# Altium PCB Energieversorgung.PcbDoc
Units mm, origin at the board's own origin, x right, y up, seen from the top; angles counter-clockwise.
Board outline 150 x 150 mm, 2 copper layers (Top Layer, Bottom Layer); 20 components, 16 nets, 81 pads, 5 vias.
Unrouted connection lines stored in the file: 7.
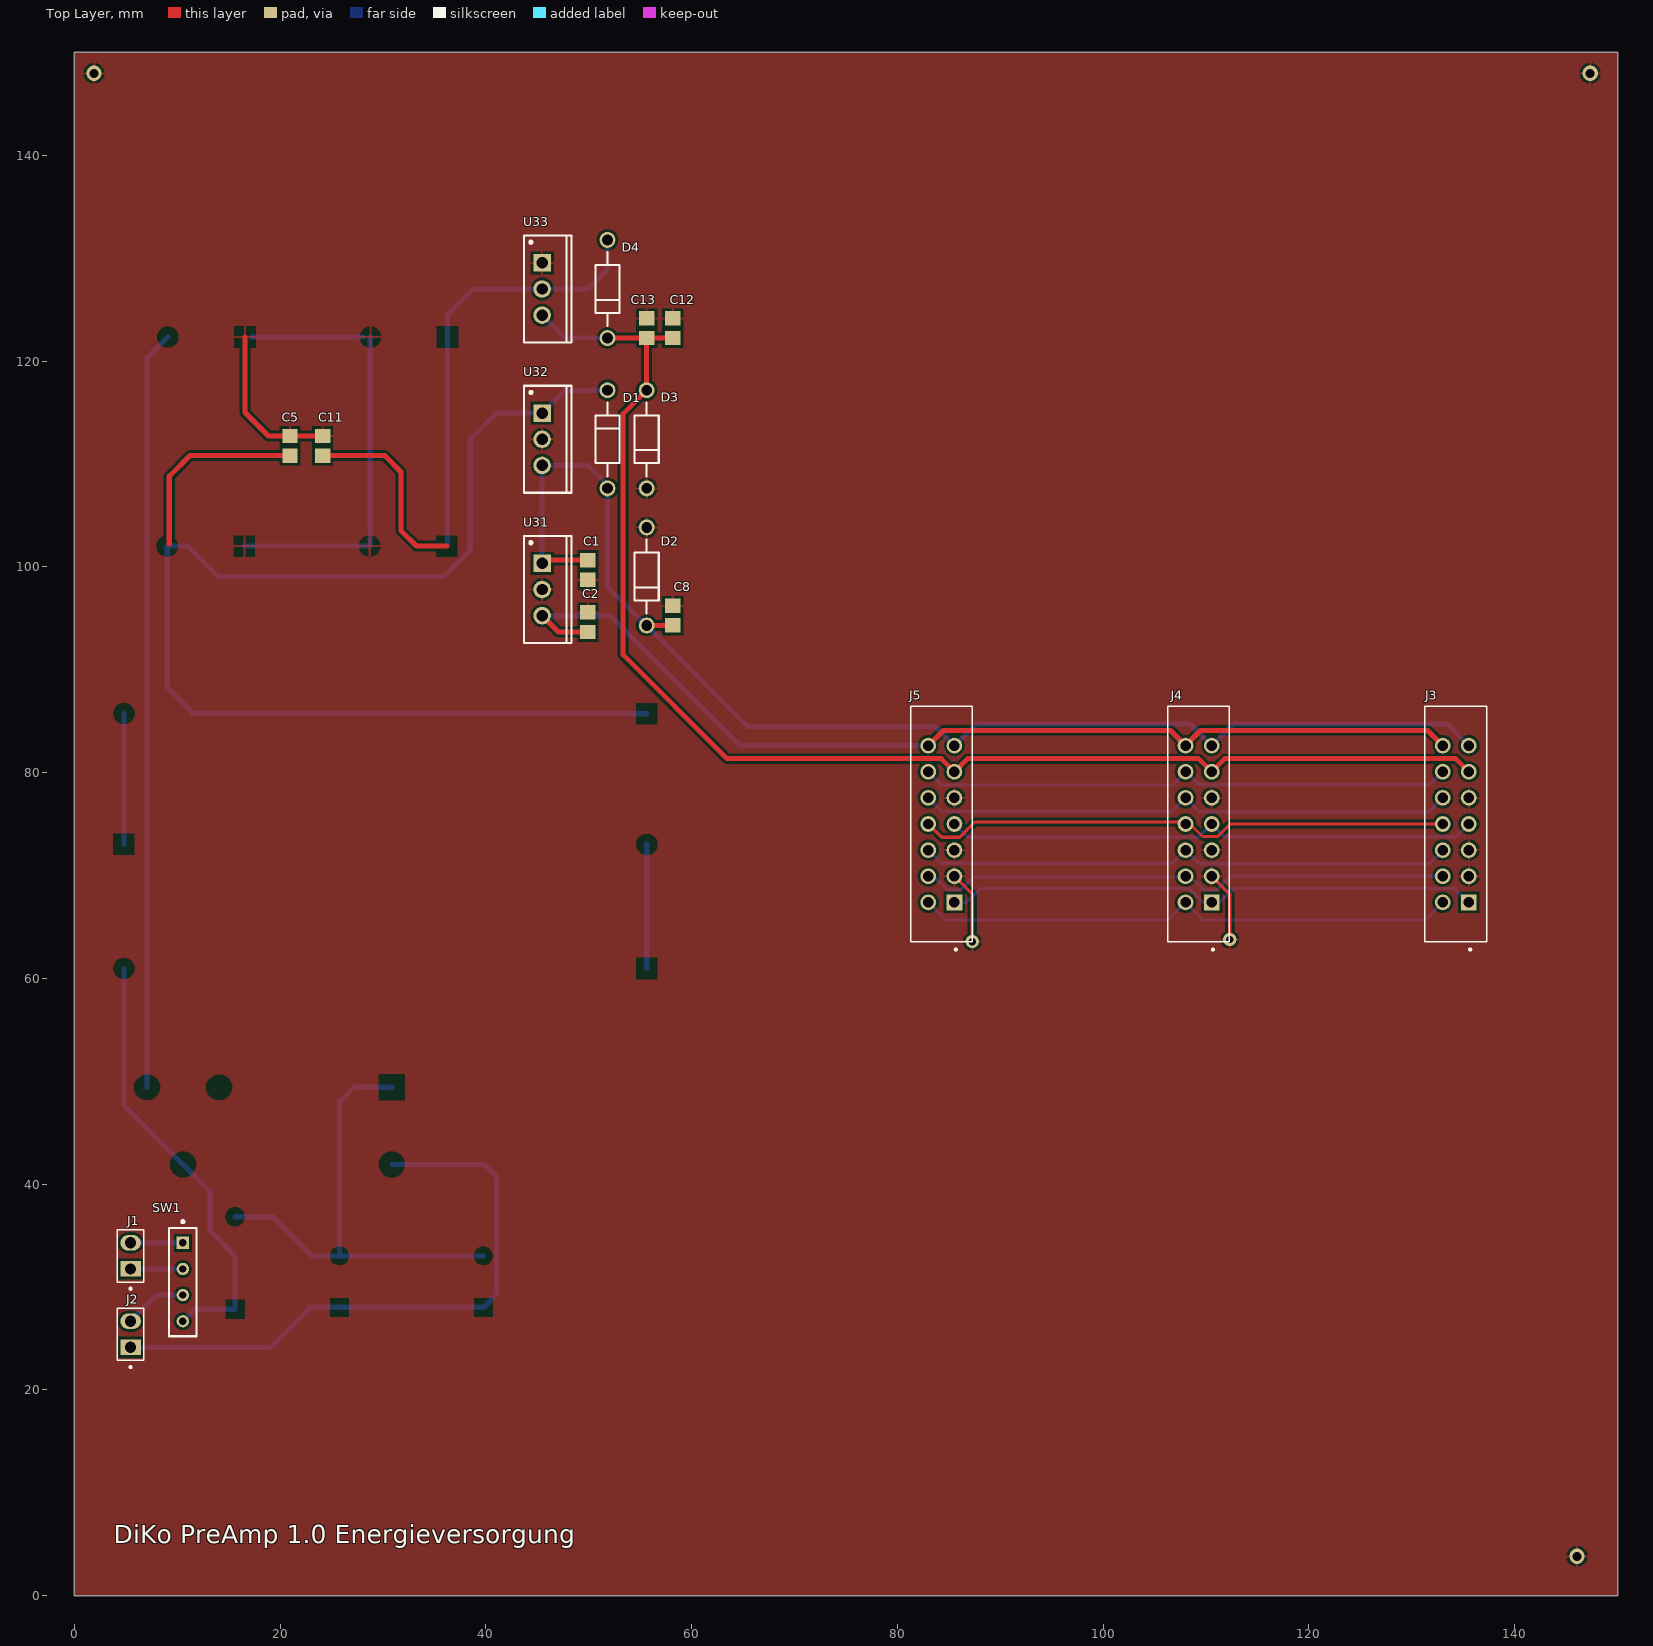
[diagram p0: Top Layer view]
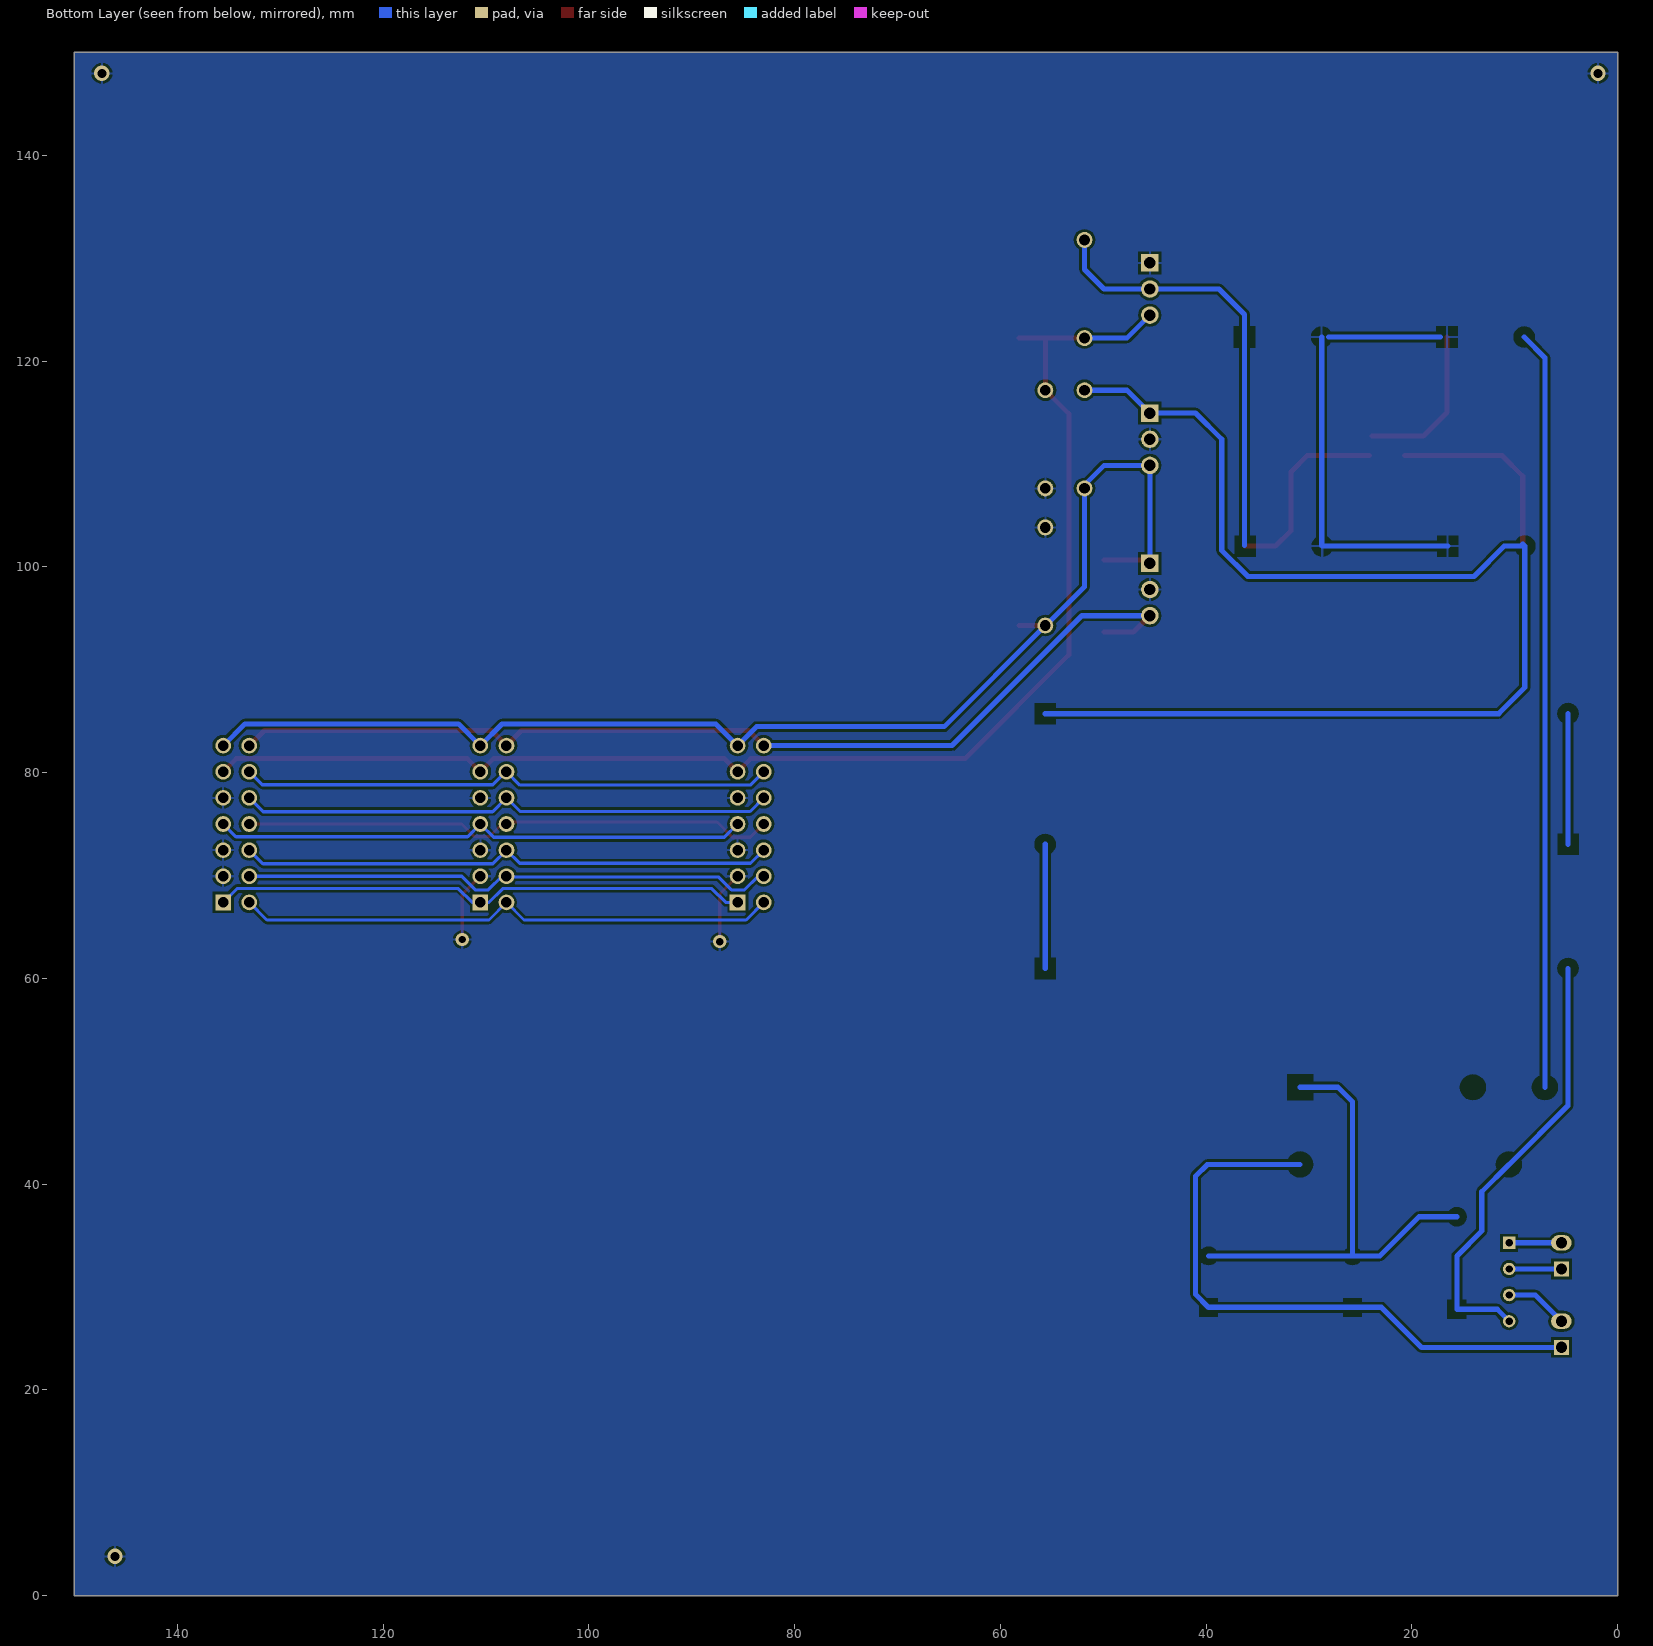
[diagram p1: Bottom Layer view, seen from below]

## Layer stack, top to bottom
Top Solder: solder mask 0.0102, Solder Resist, Dk 3.5
Top Layer: signal copper 0.0356
Dielectric 1: dielectric 0.32, FR-4, Dk 4.8
Bottom Layer: signal copper 0.0356
Bottom Solder: solder mask 0.0102, Solder Resist, Dk 3.5

## Board outline
0,0 150,0 150,150 0,150

## Design rules (kind name [scope] priority, off if disabled: settings)
Clearance [All] p1: gap=0.254 ignorepadtopadclearanceinfootprint=FALSE except(0: Arc-Hole Track-Hole SMDPad-Hole THPad-Hole Via-Hole Fill-Hole Poly-Hole Region-Hole Text-Hole)
HoleSize [All] p1: absolutevalues=TRUE maxlimit=5.08 minlimit=0.152 maxpercent=80.000 minpercent=20.000
HoleToHoleClearance [All] p1: gap=0.203 allowstackedmicrovias=TRUE
MinimumSolderMaskSliver [All] p1: minsoldermaskwidth=0.102
PolygonConnect [All] p1: connectstyle=Relief reliefconductorwidth=0.254 reliefentries=4 polygonreliefangle="90 Angle" airgapwidth=0.254
RoomDefinition Energieversorgung [InComponentClass('Energieversorgung')] p1: confinementstyle=ConfineIn formatcopy=TRUE lockcomponents=FALSE outline -25.4,-25.4 25.4,-25.4 25.4,0 -25.4,0
RoutingVias [All] p1: holewidth=0.9 width=1.5 viastyle="Through Hole" minholewidth=0.711 minwidth=1.27 maxholewidth=0.914 maxwidth=1.524
SilkToSilkClearance [All] p1: silktosilkclearance=0.102
SilkToSolderMaskClearance [IsPad] p1: minsilkscreentomaskgap=0.152 clearancetoexposedcopper=TRUE
SolderMaskExpansion [All] p1: expansion=0.051 istentingtop=FALSE
Width +18V [InNet('+18V')] p1: maxlimit=0.483 minlimit=0.381 preferedwidth=0.483 minimp=50.000000 maximp=50.000000 favimp=50.000000
Width -18V [InNet('-18V')] p2: maxlimit=0.483 minlimit=0.381 preferedwidth=0.483 minimp=50.000000 maximp=50.000000 favimp=50.000000
Width +6V [InNet('+6V')] p3: maxlimit=0.508 minlimit=0.508 preferedwidth=0.508
Width +5V_DP [InNet('5V_DP')] p4: maxlimit=0.508 minlimit=0.381 preferedwidth=0.381
Width [All] p5: maxlimit=0.508 minlimit=0.254 preferedwidth=0.305
25 further rules are at their usual default settings.

## Components (designator, comment, footprint, x,y, rotation, side; value= is the part's Value field where it differs from the comment)
C1 "330n" 0805 49.911,99.695 r90 top
C2 "100n" 0805 49.911,94.615 r270 top
C5 "330n" 0805 20.955,111.76 r270 top
C8 "100n" 0805 58.166,95.25 r270 top
C11 "2u" 0805 24.13,111.76 r270 top
C12 "1u" 0805 58.166,123.19 r270 top
C13 "100n" 0805 55.626,123.19 r90 top
D1 "1N4001 Diode" "1N4001 Diode" 51.816,112.395 r270 top
D2 "1N4001 Diode" "1N4001 Diode" 55.626,99.06 r90 top
D3 "1N4001 Diode" "1N4001 Diode" 55.626,112.395 r90 top
D4 "1N4001 Diode" "1N4001 Diode" 51.816,127 r90 top
J1 "Connector x2" "Connector x2" 5.461,33.02 r90 top
J2 "Connector x2" "Connector x2" 5.461,25.4 r90 top
J3 "Connector x14" "Connector x14" 133,75 r270 top
J4 "Connector x14" "Connector x14" 108,75 r270 top
J5 "Connector x14" "Connector x14" 83,75 r270 top
SW1 "G23AP" "Connector x4" 10.541,30.48 r270 top
U31 "7806" "TO220 Spannungsregler 78xx" 45.466,97.79 r270 top
U32 "7818" "TO220 Spannungsregler 78xx" 45.466,112.395 r270 top
U33 "7918" "TO220 Spannungsregler 79xx" 45.466,127 r270 top

## Footprints (in the part's own frame and the unit in brackets; to place one, negate y for a bottom-side part, rotate by r counter-clockwise, add the part's x,y. Pads: shape width x height; smd on the part's side, far side on the other; paste and mask are expansions set on the pad)
"1N4001 Diode" [mm] "AXIAL, 2-Leads, Diameter 2.35mm"
  round 1.55 hole 1.05: 1(-4.77,0) 2(4.77,0)
  silkscreen extent -3.59,-1.17 3.59,1.17
0805 [mm] "0805"
  rect 1.4x1.5 smd: 1(-0.95,0) 2(0.95,0)
  body extent -1.05,-0.67 1.05,0.67, height 1.35
"Connector x2" [mm]
  rect 1.508x2 / inner round 1.45 / far side rect 1.45x1.45 hole 1.1: 01(-1.27,0)
  oval 1.508x2 hole 1.1: 02(1.27,0)
  silkscreen extent -3.29,-1.27 2.54,1.27
"Connector x4" [mm]
  rect 1.2x1.2 hole 0.7 paste-1000 mask+0: 1(-3.81,0)
  round 1.2 hole 0.7 paste-1000 mask+0: 2(-1.27,0) 3(1.27,0) 4(3.81,0)
  silkscreen extent -5.99,-1.34 5.27,1.34, body extent -5.37,-1.44 5.37,1.44, height 0.25
"Connector x14" [mm]
  rect 1.53x1.53 hole 1.02: 1(7.62,2.54)
  round 1.53 hole 1.02: 2(7.62,0) 3(5.08,2.54) 4(5.08,0) 5(2.54,2.54) 6(2.54,0) 7(0,2.54) 8(0,0) 9(-2.54,2.54) 10(-2.54,0) 11(-5.08,2.54) 12(-5.08,0) 13(-7.62,2.54) 14(-7.62,0)
  silkscreen extent -11.43,-1.73 12.3,4.27
"TO220 Spannungsregler 78xx" [mm] "TO, Thru-Hole, Vertical, Heatsink Mounted; 3 In-Line Leads; Pitch 2.54 mm"
  rect 1.7x1.7 hole 1.1: 1(-2.54,0)
  round 1.7 hole 1.1: 2(0,0) 3(2.54,0)
  silkscreen extent -5.2,-1.75 5.2,2.85, body extent -5.25,-1.8 5.25,2.9, height 19.7
"TO220 Spannungsregler 79xx" [mm] "TO, Thru-Hole, Vertical, Heatsink Mounted; 3 In-Line Leads; Pitch 2.54 mm"
  rect 1.7x1.7 hole 1.1: 1(-2.54,0)
  round 1.7 hole 1.1: 2(0,0) 3(2.54,0)
  silkscreen extent -5.2,-1.75 5.2,2.85, body extent -5.25,-1.8 5.25,2.9, height 19.7

## Part data
C1 C2 C5 C8 C11 C12 C13: library part "0805 Kondensator", "0805 Kondensator"
D1 D2 D3 D4: "Standard Recovery Rectifier, 2-Pin Axial_Lead, Pb-Free, Bulk Bag", Manufacturer="On Semiconductor", PartNumber=1N4001, ComponentLink1Description="Manufacturer URL", ComponentLink1URL=http://www.onsemi.com/, ComponentLink2Description=Datasheet, ComponentLink2URL=http://www.onsemi.com/pub_link/Collateral/1N4001-D.PDF, ComponentLink3Description="Package Specification", ComponentLink3URL=http://www.onsemi.cn/pub_link/Collateral/59-10.PDF, DatasheetVersion="Rev. 13", IFSM Max (A)=30, IO(rec) Max (A)=1, Mounting Technology="Through Hole", PackageDescription="2-Pin, Axial Lead, Diameter 2.35 mm", PackageReference=AXIAL_LEAD-2-59-10, PackageVersion="Rev. U, 02/2005", Packing="Bulk Bag", RoHS=TRUE, Type="Standard Recovery", VRRM Max (V)=50
J1 J2: "Connector Header Through Hole 2 position 0.100 (2.54mm)", Package=None, Check_prices=https://www.snapeda.com/parts/61300211121/Wurth+Elektronik/view-part/?ref=eda, MF="Wurth Elektronik", MP=61300211121, SnapEDA_Link=https://www.snapeda.com/parts/61300211121/Wurth+Elektronik/view-part/?ref=snap
J3 J4 J5: "14 Position Header Connector Through Hole", Package=None, Availability=Warning, Check_prices=https://www.snapeda.com/parts/SFH11-PBPC-D07-ST-BK/Sullins%20Connector%20Solutions/view-part/851415/?ref=eda, MF="Sullins Connector", MP=SFH11-PBPC-D07-ST-BK, Price=None, Purchase-URL=https://pricing.snapeda.com/search/part/SFH11-PBPC-D07-ST-BK/?ref=eda, SnapEDA_Link=https://www.snapeda.com/parts/SFH11-PBPC-D07-ST-BK/Sullins%20Connector%20Solutions/view-part/851415/?ref=snap, System=Connector
SW1: library part "Schalter 2x3", "SWITCH TOGGLE DPDT 0.4VA 28V", Contact Current Rating=100mA, Insulation Resistance=500MR, Max Operating Temperature=85°C, Max Voltage Rating (AC)=28V, Min Operating Temperature=-25°C, Package Quantity=1, Power Rating=400mW, Actuator Length=3.8mm, Actuator Material=Nylon, Actuator Type="Standard Round", Contact Material=Bronze, Contact Plating=Gold, Current Rating=100mA, Depth=4.5mm, Electrical Life=100000Cycles, Housing Material=Polyamide, Illumination Type=Non-Illuminated, Lead Free="Lead Free", Length=7mm, Max Current Rating=100mA, Max Voltage Rating (DC)=28V, Mount="Through Hole", Orientation=Vertical, Packaging=Tray, RoHS Compliant=Yes, Series=G, Switch Function=On-Off-On, Termination="PC Pin", Throw Configuration=DPDT, Voltage Rating (AC)=28V, Voltage Rating (DC)=28V
U31 U32: library part "TO 220 Spannungsregler 78xx", "Voltage Regulator, 3-Pin TO-220"
  U31: Typ=7806
  U32: Typ=7818
U33: library part "TO 220 Spannungsregler 79xx", "Voltage Regulator, 3-Pin TO-220", Typ=7918

## Via types
v1: diameter 1.5, hole 0.9, Top Layer to Bottom Layer, 3 vias
v2: diameter 1.27, hole 0.711, Top Layer to Bottom Layer, 2 vias

## Nets (pads, with @x,y where several pads share a name; then routed paths per layer and width w, separated by ;. In a path a pad name is that pad's centre, name@x,y a point inside that pad or via, vN(x,y) a via of type N, cw(c..) or ccw(c..) an arc to the next point about the centre after c; other vN are vias at no path point)
+6V: C2.2 J3.14 J4.14 J5.14 U31.3 | length 100.3
  Top Layer w0.508: U31.3 47.051,93.665 C2.2 ; J5.14 84.47,84.09 106.53,84.09 J4.14 109.47,84.09 131.53,84.09 J3.14
  Bottom Layer w0.508: U31.3 52.07,95.25 64.7,82.62 J5.14
+18V: C1.2 C8.2 D1.2 D2.1 J3.13 J4.13 J5.13 U31.1 U32.3 | length 127.3
  Top Layer w0.483: U31.1 45.781,100.645 C1.2 ; D2.1 55.636,94.3 C8.2 C8.2@58.176,94.29
  Bottom Layer w0.483: U31.1 U32.3 49.911,109.855 51.612,108.154 51.612,107.829 D1.2 51.816,98.044 55.57,94.29 D2.1 65.461,84.455 83.705,84.455 J5.13 87.645,84.725 108.435,84.725 J4.13 112.645,84.725 133.435,84.725 J3.13
-18V: C12.2 C13.1 D3.2 D4.1 J3.11 J4.11 J5.11 U33.3 | length 134.4
  Top Layer w0.483: D4.1 C13.1@55.616,122.23 ; C12.2 C13.1 C13.1@55.616,122.23 ; J3.11 134.273,81.347 111.807,81.347 J4.11 109.273,81.347 86.807,81.347 J5.11 84.273,81.347 81.982,81.347 63.433,81.347 53.34,91.44 53.34,114.879 D3.2 55.626,122.22 C13.1@55.616,122.23
  Bottom Layer w0.483: U33.3 47.696,122.23 D4.1
ASEQ_Bass: J3.12 J4.12 J5.12 | length 52.1
  Bottom Layer w0.305: J5.12 84.305,78.775 106.695,78.775 J4.12 108.055,80.08 109.321,78.814 131.734,78.814 J3.12
ASEQ_Höhen: J3.10 J4.10 J5.10 | length 52.2
  Bottom Layer w0.305: J5.10 84.321,76.219 106.679,76.219 J4.10 109.347,76.193 131.653,76.193 J3.10
ASEQ_Kick: J3.6 J4.6 J5.6 | length 52.2
  Bottom Layer w0.305: J5.6 84.281,71.179 106.719,71.179 J4.6 109.324,71.136 131.676,71.136 J3.6
ASEQ_Mitten: J3.8 J4.8 J5.8 | length 52.2
  Top Layer w0.305: J5.8 84.292,73.708 86.039,73.708 87.531,75.2 107.8,75.2 J4.8 108.436,75 109.648,73.788 111.142,73.788 112.354,75 J3.8
AUX_Mic: J3.7 J4.7 J5.7 | length 52.1
  Bottom Layer w0.305: J5.7 86.83,73.71 109.25,73.71 J4.7 111.777,73.763 134.303,73.763 J3.7
AUX_Sum: J3.2 J4.2 J5.2 | length 52.8
  Bottom Layer w0.305: J5.2 84.705,65.675 106.295,65.675 J4.2 109.705,65.675 131.295,65.675 J3.2
"KST_1_1 / Line_Aux": J3.4 J4.4 J5.4 | length 52.2
  Bottom Layer w0.305: J5.4 83.544,69.92 84.868,68.596 86.138,68.596 87.408,69.866 107.946,69.866 J4.4 108.436,69.92 109.76,68.596 111.03,68.596 112.354,69.92 J3.4
KST_1_2: J3.1 J4.1 J5.1 | length 52.2
  Bottom Layer w0.305: J5.1 86.7,67.38 88.043,68.723 108.363,68.723 109.706,67.38 J4.1 111.338,67.38 112.681,68.723 134.197,68.723 J3.1
Masse: C1.1 C2.1 C5.1 C8.1 C11.1 C12.1 C13.2 D2.2 D3.1 J1.01 J2.02 J3.3 J3.5 J3.9 J4.3 J4.5 J4.9 J5.3 J5.5 J5.9 U31.2 U32.2 U33.1 | length 40.5
  Top Layer w0.305: J5.3 87.27,68.19 v2(87.27,63.57) ; J4.3 112.3,68.16 v2(112.3,63.77)
  Top Layer w0.508: 16.581,122.33 16.581,114.991 18.862,112.71 C5.1@20.701,112.71 ; C5.1@20.651,112.71 C11.1@23.876,112.71
  Bottom Layer w0.305: 28.071,122.33 ccw(c28.071,122.475) 28.173,122.372
  Bottom Layer w0.508: 17.216,122.33 28.071,122.33
  other v1: 146.05,3.81 1.905,147.955 147.32,147.955
NetC5_2: C5.2 D1.1 U32.1 | length 138.4
  Top Layer w0.508: 9.225,102.214 9.225,108.793 11.242,110.81 C5.2@20.701,110.81
  Bottom Layer w0.305: U32.1 U32.1@46.164,115.633
  Bottom Layer w0.508: 9.225,102.214 9.021,102.01 ; U32.1 41.021,114.935 38.481,112.395 38.481,101.6 35.941,99.06 13.97,99.06 11.02,102.01 9.225,102.01 9.021,102.01 ; U32.1@46.164,115.633 47.696,117.165 D1.1 ; 55.638,85.725 11.557,85.725 9.021,88.261 9.021,102.01
NetC11_2: C11.2 D4.2 SW1.4 U33.2 | length 104.9
  Top Layer w0.508: C11.2 30.16,110.81 31.75,109.22 31.75,103.505 33.245,102.01 36.206,102.01
  Bottom Layer w0.508: 4.814,60.96 4.826,60.948 4.826,47.625 10.541,41.91 10.561,41.91 13.208,39.263 13.208,35.433 15.621,33.02 15.621,27.83 11.701,27.83 SW1.4 ; 36.266,102.07 36.266,122.33 36.266,124.531 38.735,127 U33.2 49.911,127 51.816,128.905 D4.2
Netzteil_1+: J1.02 SW1.1 | length 5.1
  Bottom Layer w0.508: J1.02 SW1.1
Netzteil_2-: J2.01 SW1.3 | length 59.8
  Bottom Layer w0.508: J2.01 19.05,24.13 22.94,28.02 39.751,28.02 41.021,29.29 41.021,40.767 39.878,41.91 30.861,41.91
pads on no net: SW1.2
copper on no net: | length 188.6
  Bottom Layer w0.508: 4.814,73.025 4.814,85.725 ; 5.461,26.67 8.001,29.21 10.541,29.21 ; 5.461,31.75 10.541,31.75 ; 7.061,49.41 7.061,120.31 9.081,122.33 ; 15.621,36.83 19.304,36.83 23.114,33.02 25.781,33.02 ; 16.521,102.01 28.706,102.01 28.766,102.07 28.766,122.33 ; 30.861,49.41 27.185,49.41 25.781,48.006 25.781,33.02 ; 39.751,33.02 25.781,33.02 ; 55.638,60.96 55.638,73.025

## Polygon pours and split planes (outlines as drawn)
Masse on Top Layer "Top Layer-No Net" (solid, pour order 0): 0,0 150,0 150,150 0,150
Masse on Bottom Layer "Top Layer-No Net1" (solid, pour order 1): 0,0 150,0 150,150 0,150

## Silkscreen, mask and mechanical layers (free items; w line width, h text height)
Top Overlay:
  text "DiKo PreAmp 1.0 Energieversorgung" at 3.81,5.08 h1.78
Mechanical 1:
  the board outline again, w0.254